# Altium PCB Wristband-v3.PcbDoc (part 2 of 3)
Units mil, origin at the board's own origin, x right, y up, seen from the top; angles counter-clockwise.
Board outline 1990 x 930 mil, 2 copper layers (Top Layer, Bottom Layer); 20 components, 39 nets, 136 pads, 57 vias.
Unrouted connection lines stored in the file: 2.
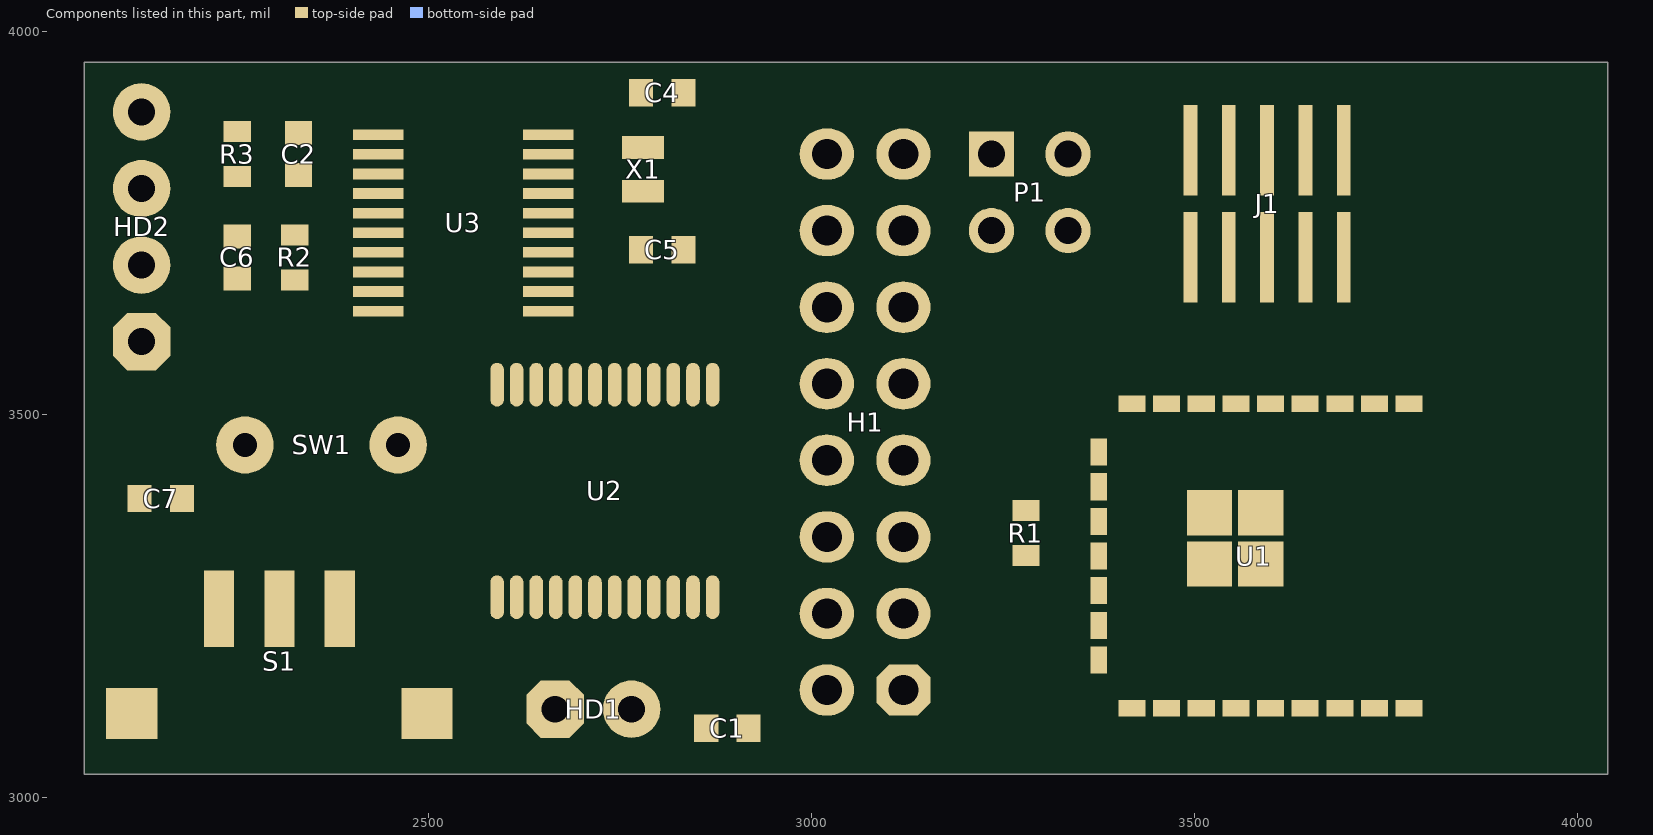
[diagram p2: the components of this part, seen from the top]

## Via types
v1: diameter 10, hole 8, Top Layer to Bottom Layer, 35 vias
v2: diameter 40, hole 25, Top Layer to Bottom Layer, 22 vias

## Nets (pads, with @x,y where several pads share a name; then routed paths per layer and width w, separated by ;. In a path a pad name is that pad's centre, name@x,y a point inside that pad or via, vN(x,y) a via of type N, cw(c..) or ccw(c..) an arc to the next point about the centre after c; other vN are vias at no path point) (continued)
copper on no net: (continued)
  Top Layer w0.5: 3808.75,3790 3836.75,3790 ; 3808.75,3790.5 3819.25,3790.5 ; 3808.75,3791 3819.25,3791 ; 3808.75,3791.5 3819.25,3791.5 ; 3808.75,3792 3819.25,3792 ; 3808.75,3792.5 3819.75,3792.5 ; 3808.75,3793 3819.75,3793 ; 3808.75,3793.5 3819.25,3793.5 ; 3808.75,3794 3818.75,3794 ; 3808.75,3794.5 3818.25,3794.5 ; 3808.75,3795 3817.25,3795 ; 3808.75,3795.5 3820.75,3795.5 ; 3808.75,3796 3820.75,3796 ; 3808.75,3796.5 3821.25,3796.5 ; 3808.75,3797 3821.25,3797 ; 3808.75,3797.5 3821.25,3797.5 ; 3808.75,3798 3821.25,3798 ; 3808.75,3798.5 3821.25,3798.5 ; 3808.75,3799 3836.25,3799 ; 3808.75,3799.5 3836.25,3799.5 ; 3808.75,3800 3836.25,3800 ; 3808.75,3800.5 3836.25,3800.5 ; 3808.75,3801 3836.25,3801 ; 3808.75,3801.5 3836.25,3801.5 ; 3808.75,3802 3836.25,3802 ; 3808.75,3802.5 3836.75,3802.5 ; 3808.75,3803 3836.75,3803 ; 3808.75,3803.5 3823.25,3803.5 ; 3808.75,3804 3818.25,3804 ; 3808.75,3804.5 3816.75,3804.5 ; 3808.75,3805 3816.75,3805 ; 3809.25,3786 3837.25,3786 ; 3809.25,3786.5 3837.25,3786.5 ; 3809.25,3787 3837.25,3787 ; 3809.25,3787.5 3837.25,3787.5 ; 3809.25,3788 3837.25,3788 ; 3809.25,3788.5 3837.25,3788.5 ; 3809.25,3789 3836.75,3789 ; 3809.25,3789.5 3836.75,3789.5 ; 3809.25,3805.5 3816.75,3805.5 ; 3809.25,3806 3816.75,3806 ; 3809.25,3806.5 3816.75,3806.5 ; 3809.25,3807 3817.25,3807 ; 3809.25,3807.5 3819.25,3807.5 ; 3809.25,3808 3821.75,3808 ; 3809.25,3808.5 3822.75,3808.5 ; 3809.25,3809 3821.25,3809 ; 3809.25,3809.5 3819.75,3809.5 ; 3809.25,3810 3818.75,3810 ; 3809.75,3781 3818.25,3781 ; 3809.75,3781.5 3819.25,3781.5 ; 3809.75,3782 3819.75,3782 ; 3809.75,3782.5 3821.75,3782.5 ; 3809.75,3783 3823.75,3783 ; 3809.75,3783.5 3826.25,3783.5 ; 3809.75,3784 3837.75,3784 ; 3809.75,3784.5 3837.75,3784.5 ; 3809.75,3785 3837.25,3785 ; 3809.75,3785.5 3837.25,3785.5 ; 3809.75,3810.5 3817.25,3810.5 ; 3809.75,3811 3817.25,3811 ; 3809.75,3811.5 3817.25,3811.5 ; 3809.75,3812 3817.25,3812 ; 3809.75,3812.5 3817.25,3812.5 ; 3809.75,3813 3817.25,3813 ; 3809.75,3813.5 3817.25,3813.5 ; 3809.75,3814 3838.25,3814 ; 3809.75,3814.5 3838.25,3814.5 ; 3810.25,3778.5 3818.25,3778.5 ; 3810.25,3779 3818.25,3779 ; 3810.25,3779.5 3818.25,3779.5 ; 3810.25,3780 3818.25,3780 ; 3810.25,3780.5 3818.25,3780.5 ; 3810.25,3815 3838.25,3815 ; 3810.25,3815.5 3838.25,3815.5 ; 3810.25,3816 3822.25,3816 ; 3810.25,3816.5 3820.75,3816.5 ; 3810.75,3776 3819.25,3776 ; 3810.75,3776.5 3818.75,3776.5 ; 3810.75,3777 3818.25,3777 ; 3810.75,3777.5 3818.25,3777.5 ; 3810.75,3778 3818.25,3778 ; 3810.75,3817 3820.25,3817 ; 3810.75,3817.5 3819.75,3817.5 ; 3810.75,3818 3819.25,3818 ; 3810.75,3818.5 3818.75,3818.5 ; 3810.75,3819 3818.75,3819 ; 3810.75,3819.5 3818.75,3819.5 ; 3811.25,3774.5 3840.25,3774.5 ; 3811.25,3775 3820.25,3775 ; 3811.25,3775.5 3819.75,3775.5 ; 3811.25,3820 3818.75,3820 ; 3811.25,3820.5 3818.75,3820.5 ; 3811.25,3821 3818.75,3821 ; 3811.75,3772 3822.75,3772 ; 3811.75,3772.5 3824.75,3772.5 ; 3811.75,3773 3825.75,3773 ; 3811.75,3773.5 3827.25,3773.5 ; 3811.75,3774 3840.25,3774 ; 3811.75,3821.5 3818.75,3821.5 ; 3811.75,3822 3819.25,3822 ; 3811.75,3822.5 3819.25,3822.5 ; 3811.75,3823 3819.75,3823 ; 3811.75,3823.5 3820.25,3823.5 ; 3812.25,3770.5 3820.25,3770.5 ; 3812.25,3771 3820.25,3771 ; 3812.25,3771.5 3821.75,3771.5 ; 3812.25,3824 3820.75,3824 ; 3812.25,3824.5 3821.75,3824.5 ; 3812.25,3825 3841.75,3825 ; 3812.75,3768.5 3824.75,3768.5 ; 3812.75,3769 3824.75,3769 ; 3812.75,3769.5 3825.25,3769.5 ; 3812.75,3770 3820.25,3770 ; 3812.75,3825.5 3828.75,3825.5 ; 3812.75,3826 3827.75,3826 ; 3812.75,3826.5 3826.25,3826.5 ; 3812.75,3827 3825.25,3827 ; 3813.25,3767 3823.25,3767 ; 3813.25,3767.5 3823.75,3767.5 ; 3813.25,3768 3824.25,3768 ; 3813.25,3827.5 3823.75,3827.5 ; 3813.25,3828 3822.75,3828 ; 3813.25,3828.5 3821.25,3828.5 ; 3813.75,3765 3822.25,3765 ; 3813.75,3765.5 3822.25,3765.5 ; 3813.75,3766 3822.25,3766 ; 3813.75,3766.5 3822.75,3766.5 ; 3813.75,3829 3821.25,3829 ; 3813.75,3829.5 3821.25,3829.5 ; 3813.75,3830 3821.75,3830 ; 3813.75,3830.5 3821.75,3830.5 ; 3814.25,3764 3822.25,3764 ; 3814.25,3764.5 3822.25,3764.5 ; 3814.25,3831 3822.25,3831 ; 3814.25,3831.5 3822.25,3831.5 ; 3814.75,3762.5 3828.25,3762.5 ; 3814.75,3763 3829.25,3763 ; 3814.75,3763.5 3830.75,3763.5 ; 3814.75,3832 3822.25,3832 ; 3814.75,3832.5 3822.75,3832.5 ; 3814.75,3833 3822.75,3833 ; 3815.25,3761.5 3826.25,3761.5 ; 3815.25,3762 3827.25,3762 ; 3815.25,3833.5 3823.25,3833.5 ; 3815.25,3834 3823.25,3834 ; 3815.75,3759.5 3824.25,3759.5 ; 3815.75,3760 3824.25,3760 ; 3815.75,3760.5 3824.25,3760.5 ; 3815.75,3761 3824.75,3761 ; 3815.75,3834.5 3823.75,3834.5 ; 3815.75,3835 3832.25,3835 ; 3815.75,3835.5 3831.25,3835.5 ; 3816.25,3759 3831.25,3759 ; 3816.25,3836 3830.25,3836 ; 3816.25,3836.5 3829.25,3836.5 ; 3816.75,3757.5 3830.25,3757.5 ; 3816.75,3758 3830.25,3758 ; 3816.75,3758.5 3831.25,3758.5 ; 3816.75,3837 3828.25,3837 ; 3816.75,3837.5 3827.25,3837.5 ; 3816.75,3838 3826.25,3838 ; 3817.25,3756.5 3829.25,3756.5 ; 3817.25,3757 3829.25,3757 ; 3817.25,3838.5 3825.25,3838.5 ; 3817.25,3839 3825.75,3839 ; 3817.75,3755.5 3828.25,3755.5 ; 3817.75,3756 3828.25,3756 ; 3817.75,3839.5 3825.75,3839.5 ; 3817.75,3840 3832.75,3840 ; 3817.75,3840.5 3831.75,3840.5 ; 3818.25,3754.5 3827.25,3754.5 ; 3818.25,3755 3827.75,3755 ; 3818.25,3806 3836.75,3806 ; 3818.25,3813.5 3838.25,3813.5 ; 3818.25,3841 3831.25,3841 ; 3818.75,3753 3827.75,3753 ; 3818.75,3753.5 3827.25,3753.5 ; 3818.75,3754 3827.25,3754 ; 3818.75,3811.5 3820.25,3811.5 ; 3818.75,3841.5 3830.25,3841.5 ; 3818.75,3842 3829.75,3842 ; 3818.75,3842.5 3828.75,3842.5 ; 3819.25,3752.5 3836.75,3752.5 ; 3819.25,3843 3828.25,3843 ; 3819.75,3751 3834.75,3751 ; 3819.75,3751.5 3835.25,3751.5 ; 3819.75,3752 3836.25,3752 ; 3819.75,3777.5 3825.75,3777.5 ; 3819.75,3778 3827.25,3778 ; 3819.75,3778.5 3839.25,3778.5 ; 3819.75,3779 3838.75,3779 ; 3819.75,3779.5 3838.75,3779.5 ; 3819.75,3780 3838.75,3780 ; 3819.75,3790.5 3836.75,3790.5 ; 3819.75,3811 3837.75,3811 ; 3819.75,3843.5 3827.75,3843.5 ; 3819.75,3844 3828.25,3844 ; 3819.75,3844.5 3828.25,3844.5 ; 3820.25,3750.5 3834.25,3750.5 ; 3820.25,3791 3822.75,3791 ; 3820.25,3819.5 3826.75,3819.5 ; 3820.25,3820 3826.75,3820 ; 3820.25,3820.5 3826.75,3820.5 ; 3820.25,3821 3826.75,3821 ; 3820.25,3821.5 3826.25,3821.5 ; 3820.25,3845 3839.75,3845 ; 3820.75,3749.5 3832.75,3749.5 ; 3820.75,3750 3833.25,3750 ; 3820.75,3777 3822.75,3777 ; 3820.75,3780.5 3838.25,3780.5 ; 3820.75,3791.5 3822.25,3791.5 ; 3820.75,3819 3826.75,3819 ; 3820.75,3822 3825.75,3822 ; 3820.75,3845.5 3838.75,3845.5 ; 3820.75,3846 3838.25,3846 ; 3821.25,3748.5 3831.25,3748.5 ; 3821.25,3749 3831.75,3749 ; 3821.25,3805.5 3836.75,3805.5 ; 3821.25,3806.5 3836.75,3806.5 ; 3821.25,3810.5 3837.25,3810.5 ; 3821.25,3818.5 3826.25,3818.5 ; 3821.25,3846.5 3837.75,3846.5 ; 3821.25,3847 3837.25,3847 ; 3821.75,3747.5 3831.25,3747.5 ; 3821.75,3748 3830.75,3748 ; 3821.75,3797 3836.25,3797 ; 3821.75,3797.5 3836.25,3797.5 ; 3821.75,3798 3836.25,3798 ; 3821.75,3798.5 3836.25,3798.5 ; 3821.75,3818 3826.25,3818 ; 3821.75,3822.5 3823.75,3822.5 ; 3821.75,3847.5 3836.25,3847.5 ; 3821.75,3848 3835.75,3848 ; 3822.25,3746.5 3831.75,3746.5 ; 3822.25,3747 3831.25,3747 ; 3822.25,3770 3825.75,3770 ; 3822.25,3775 3840.25,3775 ; 3822.25,3795.5 3836.25,3795.5 ; 3822.25,3796 3836.25,3796 ; 3822.25,3796.5 3836.25,3796.5 ; 3822.25,3810 3837.25,3810 ; 3822.25,3848.5 3835.25,3848.5 ; 3822.25,3849 3834.25,3849 ; 3822.75,3745.5 3832.75,3745.5 ; 3822.75,3746 3832.25,3746 ; 3822.75,3781 3838.25,3781 ; 3822.75,3830 3825.75,3830 ; 3822.75,3849.5 3833.75,3849.5 ; 3822.75,3850 3833.25,3850 ; 3823.25,3745 3832.75,3745 ; 3823.25,3764 3831.25,3764 ; 3823.25,3792.5 3836.75,3792.5 ; 3823.25,3793 3836.75,3793 ; 3823.25,3807 3837.25,3807 ; 3823.25,3830.5 3825.75,3830.5 ; 3823.25,3831 3826.25,3831 ; 3823.25,3850.5 3832.25,3850.5 ; 3823.75,3744 3833.75,3744 ; 3823.75,3744.5 3833.25,3744.5 ; 3823.75,3770.5 3826.25,3770.5 ; 3823.75,3775.5 3839.75,3775.5 ; 3823.75,3791 3836.75,3791 ; 3823.75,3791.5 3836.75,3791.5 ; 3823.75,3792 3836.75,3792 ; 3823.75,3793.5 3836.75,3793.5 ; 3823.75,3809.5 3837.25,3809.5 ; 3823.75,3813 3838.25,3813 ; 3823.75,3829.5 3825.25,3829.5 ; 3823.75,3831.5 3826.25,3831.5 ; 3823.75,3832 3826.25,3832 ; 3823.75,3851 3833.25,3851 ; 3823.75,3851.5 3833.25,3851.5 ; 3824.25,3743.5 3834.25,3743.5 ; 3824.25,3764.5 3844.75,3764.5 ; 3824.25,3794 3836.25,3794 ; 3824.25,3824.5 3841.75,3824.5 ; 3824.25,3832.5 3825.75,3832.5 ; 3824.25,3852 3833.75,3852 ; 3824.75,3742.5 3838.25,3742.5 ; 3824.75,3743 3838.75,3743 ; 3824.75,3781.5 3838.25,3781.5 ; 3824.75,3794.5 3836.25,3794.5 ; 3824.75,3829 3825.25,3829 ; 3824.75,3852.5 3834.25,3852.5 ; 3824.75,3853 3834.25,3853 ; 3825.25,3742 3837.75,3742 ; 3825.25,3767 3826.25,3767 ; 3825.25,3771 3826.75,3771 ; 3825.25,3809 3837.25,3809 ; 3825.25,3853.5 3834.75,3853.5 ; 3825.75,3741 3836.25,3741 ; 3825.75,3741.5 3837.25,3741.5 ; 3825.75,3759.5 3832.25,3759.5 ; 3825.75,3765 3844.25,3765 ; 3825.75,3767.5 3828.25,3767.5 ; 3825.75,3768 3829.25,3768 ; 3825.75,3795 3836.25,3795 ; 3825.75,3816 3838.75,3816 ; 3825.75,3824 3841.25,3824 ; 3825.75,3854 3835.25,3854 ; 3825.75,3854.5 3835.75,3854.5 ; 3826.25,3740.5 3836.25,3740.5 ; 3826.25,3768.5 3842.75,3768.5 ; 3826.25,3803.5 3836.75,3803.5 ; 3826.25,3804 3836.75,3804 ; 3826.25,3804.5 3836.75,3804.5 ; 3826.25,3805 3836.75,3805 ; 3826.25,3807.5 3837.25,3807.5 ; 3826.25,3834.5 3832.75,3834.5 ; 3826.25,3855 3836.25,3855 ; 3826.75,3739.5 3840.75,3739.5 ; 3826.75,3740 3836.75,3740 ; 3826.75,3760 3832.25,3760 ; 3826.75,3769 3842.25,3769 ; 3826.75,3776 3839.75,3776 ; 3826.75,3782.5 3838.25,3782.5 ; 3826.75,3783 3837.75,3783 ; 3826.75,3783.5 3837.75,3783.5 ; 3826.75,3808 3837.25,3808 ; 3826.75,3808.5 3837.25,3808.5 ; 3826.75,3811.5 3837.75,3811.5 ; 3826.75,3812 3837.75,3812 ; 3826.75,3812.5 3837.75,3812.5 ; 3826.75,3816.5 3838.75,3816.5 ; 3826.75,3823.5 3841.25,3823.5 ; 3826.75,3828.5 3829.75,3828.5 ; 3826.75,3829 3830.25,3829 ; 3826.75,3829.5 3830.25,3829.5 ; 3826.75,3830 3830.25,3830 ; 3826.75,3833.5 3845.75,3833.5 ; 3826.75,3834 3846.25,3834 ; 3826.75,3855.5 3836.25,3855.5 ; 3826.75,3856 3846.25,3856 ; 3827.25,3739 3840.75,3739 ; 3827.25,3765.5 3843.75,3765.5 ; 3827.25,3769.5 3842.25,3769.5 ; 3827.25,3782 3838.25,3782 ; 3827.25,3817 3838.75,3817 ; 3827.25,3823 3840.75,3823 ; 3827.25,3828 3829.75,3828 ; 3827.25,3830.5 3830.25,3830.5 ; 3827.25,3832.5 3827.75,3832.5 ; 3827.25,3833 3828.25,3833 ; 3827.25,3839.5 3833.25,3839.5 ; 3827.25,3856.5 3845.75,3856.5 ; 3827.75,3738 3840.25,3738 ; 3827.75,3738.5 3840.25,3738.5 ; 3827.75,3760.5 3833.25,3760.5 ; 3827.75,3770 3841.75,3770 ; 3827.75,3770.5 3841.75,3770.5 ; 3827.75,3777.5 3839.25,3777.5 ; 3827.75,3778 3839.25,3778 ; 3827.75,3817.5 3839.25,3817.5 ; 3827.75,3818 3839.25,3818 ; 3827.75,3822 3840.25,3822 ; 3827.75,3822.5 3840.75,3822.5 ; 3827.75,3831 3830.25,3831 ; 3827.75,3839 3834.25,3839 ; 3827.75,3857 3845.75,3857 ; 3827.75,3857.5 3845.75,3857.5 ; 3828.25,3737.5 3840.25,3737.5 ; 3828.25,3771 3841.75,3771 ; 3828.25,3776.5 3839.25,3776.5 ; 3828.25,3777 3839.25,3777 ; 3828.25,3818.5 3839.25,3818.5 ; 3828.25,3819 3839.25,3819 ; 3828.25,3821 3840.25,3821 ; 3828.25,3821.5 3840.25,3821.5 ; 3828.25,3831.5 3829.25,3831.5 ; 3828.25,3858 3845.75,3858 ; 3828.75,3736.5 3839.75,3736.5 ; 3828.75,3737 3839.75,3737 ; 3828.75,3753 3837.25,3753 ; 3828.75,3766 3843.75,3766 ; 3828.75,3771.5 3841.25,3771.5 ; 3828.75,3819.5 3839.75,3819.5 ; 3828.75,3820 3839.75,3820 ; 3828.75,3820.5 3840.25,3820.5 ; 3828.75,3827.5 3829.25,3827.5 ; 3828.75,3844.5 3853.25,3844.5 ; 3828.75,3858.5 3845.75,3858.5 ; 3828.75,3859 3845.75,3859 ; 3829.25,3761 3833.25,3761 ; 3829.25,3772 3841.25,3772 ; 3829.25,3772.5 3840.75,3772.5 ; 3829.25,3773 3840.75,3773 ; 3829.25,3773.5 3840.75,3773.5 ; 3829.25,3838.5 3835.25,3838.5 ; 3829.25,3859.5 3845.75,3859.5 ; 3829.75,3735.5 3846.75,3735.5 ; 3829.75,3736 3840.25,3736 ; 3829.75,3761.5 3846.25,3761.5 ; 3829.75,3766.5 3843.75,3766.5 ; 3829.75,3825.5 3841.75,3825.5 ; 3829.75,3838 3848.25,3838 ; 3829.75,3844 3852.75,3844 ; 3829.75,3860 3844.75,3860 ; 3830.25,3735 3843.75,3735 ; 3830.25,3753.5 3849.75,3753.5 ; 3830.25,3755.5 3832.75,3755.5 ; 3830.25,3826 3842.25,3826 ; 3830.25,3826.5 3842.25,3826.5 ; 3830.25,3860.5 3843.75,3860.5 ; 3830.75,3734.5 3843.75,3734.5 ; 3830.75,3756 3834.75,3756 ; 3830.75,3768 3842.75,3768 ; 3830.75,3827 3842.75,3827 ; 3830.75,3827.5 3842.75,3827.5 ; 3830.75,3828 3842.75,3828 ; 3830.75,3833 3845.25,3833 ; 3830.75,3843.5 3837.25,3843.5 ; 3830.75,3861 3843.75,3861 ; 3830.75,3861.5 3843.75,3861.5 ; 3831.25,3734 3843.25,3734 ; 3831.25,3756.5 3849.25,3756.5 ; 3831.25,3762 3845.75,3762 ; 3831.25,3767 3843.25,3767 ; 3831.25,3767.5 3842.75,3767.5 ; 3831.25,3828.5 3843.25,3828.5 ; 3831.25,3829 3843.25,3829 ; 3831.25,3832.5 3845.25,3832.5 ; 3831.25,3837.5 3847.75,3837.5 ; 3831.25,3843 3837.25,3843 ; 3831.25,3862 3843.25,3862 ; 3831.75,3733 3843.75,3733 ; 3831.75,3733.5 3843.75,3733.5 ; 3831.75,3757 3848.75,3757 ; 3831.75,3829.5 3843.75,3829.5 ; 3831.75,3830 3843.75,3830 ; 3831.75,3830.5 3844.25,3830.5 ; 3831.75,3831 3844.25,3831 ; 3831.75,3831.5 3844.75,3831.5 ; 3831.75,3832 3844.75,3832 ; 3831.75,3837 3847.75,3837 ; 3831.75,3862.5 3843.75,3862.5 ; 3832.25,3732.5 3843.75,3732.5 ; 3832.25,3757.5 3848.75,3757.5 ; 3832.25,3762.5 3845.75,3762.5 ; 3832.25,3842.5 3836.75,3842.5 ; 3832.25,3863 3843.75,3863 ; 3832.75,3731.5 3844.75,3731.5 ; 3832.75,3732 3844.25,3732 ; 3832.75,3747.5 3836.25,3747.5 ; 3832.75,3758 3848.25,3758 ; 3832.75,3758.5 3847.75,3758.5 ; 3832.75,3763.5 3844.75,3763.5 ; 3832.75,3764 3844.75,3764 ; 3832.75,3836.5 3847.25,3836.5 ; 3832.75,3842 3836.25,3842 ; 3832.75,3863.5 3843.75,3863.5 ; 3832.75,3864 3844.75,3864 ; 3833.25,3747 3850.75,3747 ; 3833.25,3748 3836.25,3748 ; 3833.25,3754 3849.75,3754 ; 3833.25,3763 3845.25,3763 ; 3833.75,3731 3844.75,3731 ; 3833.75,3746 3842.25,3746 ; 3833.75,3746.5 3842.75,3746.5 ; 3833.75,3748.5 3835.75,3748.5 ; 3833.75,3759 3847.25,3759 ; 3833.75,3759.5 3847.25,3759.5 ; 3833.75,3761 3846.25,3761 ; 3833.75,3834.5 3846.25,3834.5 ; 3833.75,3836 3847.25,3836 ; 3833.75,3841.5 3836.25,3841.5 ; 3833.75,3864.5 3844.75,3864.5 ; 3833.75,3865 3858.75,3865 ; 3834.25,3730.5 3845.75,3730.5 ; 3834.25,3745.5 3841.75,3745.5 ; 3834.25,3760.5 3846.75,3760.5 ; 3834.25,3835 3846.75,3835 ; 3834.25,3835.5 3846.75,3835.5 ; 3834.25,3841 3835.75,3841 ; 3834.75,3729.5 3851.25,3729.5 ; 3834.75,3730 3851.75,3730 ; 3834.75,3743.5 3839.25,3743.5 ; 3834.75,3744.5 3840.25,3744.5 ; 3834.75,3745 3841.25,3745 ; 3834.75,3749 3835.25,3749 ; 3834.75,3760 3846.75,3760 ; 3834.75,3851 3837.75,3851 ; 3834.75,3865.5 3858.75,3865.5 ; 3834.75,3866 3858.25,3866 ; 3835.25,3729 3850.75,3729 ; 3835.25,3744 3839.75,3744 ; 3835.25,3754.5 3849.75,3754.5 ; 3835.25,3850.5 3837.25,3850.5 ; 3835.25,3851.5 3838.25,3851.5 ; 3835.25,3866.5 3857.75,3866.5 ; 3835.75,3728.5 3850.25,3728.5 ; 3835.75,3838.5 3848.75,3838.5 ; 3835.75,3850 3837.25,3850 ; 3835.75,3852 3860.25,3852 ; 3835.75,3852.5 3860.75,3852.5 ; 3835.75,3867 3857.75,3867 ; 3836.25,3728 3849.75,3728 ; 3836.25,3750 3839.25,3750 ; 3836.25,3839 3849.25,3839 ; 3836.25,3853 3861.25,3853 ; 3836.25,3867.5 3857.25,3867.5 ; 3836.75,3727.5 3849.75,3727.5 ; 3836.75,3749 3839.75,3749 ; 3836.75,3749.5 3839.25,3749.5 ; 3836.75,3750.5 3838.75,3750.5 ; 3836.75,3755.5 3849.75,3755.5 ; 3836.75,3756 3849.25,3756 ; 3836.75,3839.5 3849.25,3839.5 ; 3836.75,3840 3849.75,3840 ; 3836.75,3853.5 3861.75,3853.5 ; 3836.75,3854 3862.25,3854 ; 3836.75,3855.5 3846.75,3855.5 ; 3836.75,3868 3856.75,3868 ; 3837.25,3727 3849.75,3727 ; 3837.25,3747.5 3850.25,3747.5 ; 3837.25,3748.5 3840.25,3748.5 ; 3837.25,3755 3849.75,3755 ; 3837.25,3840.5 3850.25,3840.5 ; 3837.25,3841 3850.75,3841 ; 3837.25,3855 3863.75,3855 ; 3837.25,3868.5 3856.75,3868.5 ; 3837.75,3726.5 3857.25,3726.5 ; 3837.75,3740 3841.25,3740 ; 3837.75,3748 3840.25,3748 ; 3837.75,3751 3838.25,3751 ; 3837.75,3841.5 3850.75,3841.5 ; 3837.75,3842 3851.25,3842 ; 3837.75,3848.5 3841.25,3848.5 ; 3837.75,3849 3841.75,3849 ; 3837.75,3854.5 3862.75,3854.5 ; 3837.75,3869 3856.25,3869 ; 3838.25,3726 3856.75,3726 ; 3838.25,3740.5 3841.25,3740.5 ; 3838.25,3842.5 3851.75,3842.5 ; 3838.25,3849.5 3841.75,3849.5 ; 3838.25,3850 3842.25,3850 ; 3838.25,3869.5 3855.75,3869.5 ; 3838.75,3725.5 3856.75,3725.5 ; 3838.75,3752.5 3849.75,3752.5 ; 3838.75,3753 3849.75,3753 ; 3838.75,3790.5 3863.75,3790.5 ; 3838.75,3791 3863.75,3791 ; 3838.75,3791.5 3863.75,3791.5 ; 3838.75,3792 3863.75,3792 ; 3838.75,3792.5 3863.75,3792.5 ; 3838.75,3793 3863.75,3793 ; 3838.75,3793.5 3863.75,3793.5 ; 3838.75,3794 3863.75,3794 ; 3838.75,3794.5 3863.75,3794.5 ; 3838.75,3795 3863.75,3795 ; 3838.75,3795.5 3863.75,3795.5 ; 3838.75,3796 3863.75,3796 ; 3838.75,3796.5 3863.75,3796.5 ; 3838.75,3797 3863.75,3797 ; 3838.75,3797.5 3863.75,3797.5 ; 3838.75,3798 3863.75,3798 ; 3838.75,3798.5 3863.75,3798.5 ; 3838.75,3799 3863.75,3799 ; 3838.75,3799.5 3863.75,3799.5 ; 3838.75,3800 3863.75,3800 ; 3838.75,3800.5 3863.75,3800.5 ; 3838.75,3801 3863.75,3801 ; 3838.75,3801.5 3863.75,3801.5 ; 3838.75,3802 3863.75,3802 ; 3838.75,3802.5 3863.75,3802.5 ; 3838.75,3803 3863.75,3803 ; 3838.75,3803.5 3863.75,3803.5 ; 3838.75,3804 3863.75,3804 ; 3838.75,3804.5 3863.75,3804.5 ; 3838.75,3805 3863.75,3805 ; 3838.75,3843 3851.75,3843 ; 3838.75,3843.5 3852.25,3843.5 ; 3838.75,3848 3840.75,3848 ; 3838.75,3850.5 3842.75,3850.5 ; 3838.75,3851.5 3859.75,3851.5 ; 3838.75,3870 3855.75,3870 ; 3839.25,3725 3855.75,3725 ; 3839.25,3741 3841.25,3741 ; 3839.25,3752 3849.75,3752 ; 3839.25,3787.5 3863.75,3787.5 ; 3839.25,3788 3863.75,3788 ; 3839.25,3788.5 3863.75,3788.5 ; 3839.25,3789 3863.75,3789 ; 3839.25,3789.5 3863.75,3789.5 ; 3839.25,3790 3863.75,3790 ; 3839.25,3805.5 3863.75,3805.5 ; 3839.25,3806 3863.75,3806 ; 3839.25,3806.5 3863.75,3806.5 ; 3839.25,3807 3863.75,3807 ; 3839.25,3807.5 3863.75,3807.5 ; 3839.25,3808 3863.75,3808 ; 3839.25,3847.5 3840.25,3847.5 ; 3839.25,3851 3859.25,3851 ; 3839.25,3870.5 3855.25,3870.5 ; 3839.75,3724.5 3855.75,3724.5 ; 3839.75,3741.5 3840.75,3741.5 ; 3839.75,3751.5 3849.75,3751.5 ; 3839.75,3784 3863.75,3784 ; 3839.75,3784.5 3863.75,3784.5 ; 3839.75,3785 3863.75,3785 ; 3839.75,3785.5 3863.75,3785.5 ; 3839.75,3786 3863.75,3786 ; 3839.75,3786.5 3863.75,3786.5 ; 3839.75,3787 3863.75,3787 ; 3839.75,3808.5 3863.75,3808.5 ; 3839.75,3809 3863.75,3809 ; 3839.75,3809.5 3863.75,3809.5 ; 3839.75,3810 3863.75,3810 ; 3839.75,3810.5 3863.75,3810.5 ; 3839.75,3811 3863.75,3811 ; 3839.75,3811.5 3863.75,3811.5 ; 3839.75,3871 3854.75,3871 ; 3840.25,3724 3855.25,3724 ; 3840.25,3750.5 3849.75,3750.5 ; 3840.25,3751 3849.75,3751 ; 3840.25,3782 3925.75,3782 ; 3840.25,3782.5 3925.75,3782.5 ; 3840.25,3783 3925.25,3783 ; 3840.25,3783.5 3925.25,3783.5 ; 3840.25,3812 3869.25,3812 ; 3840.25,3812.5 3868.75,3812.5 ; 3840.25,3813 3868.75,3813 ; 3840.25,3813.5 3869.25,3813.5 ; 3840.25,3845 3853.75,3845 ; 3840.25,3871.5 3854.75,3871.5 ; 3840.75,3723.5 3854.75,3723.5 ; 3840.75,3750 3849.75,3750 ; 3840.75,3780.5 3926.25,3780.5 ; 3840.75,3781 3926.25,3781 ; 3840.75,3781.5 3925.75,3781.5 ; 3840.75,3814 3869.25,3814 ; 3840.75,3814.5 3869.25,3814.5 ; 3840.75,3815 3869.25,3815 ; 3840.75,3845.5 3853.75,3845.5 ; 3840.75,3872 3854.75,3872 ; 3841.25,3723 3854.75,3723 ; 3841.25,3736 3846.75,3736 ; 3841.25,3736.5 3846.75,3736.5 ; 3841.25,3737 3846.75,3737 ; 3841.25,3742.5 3844.75,3742.5 ; 3841.25,3743 3844.75,3743 ; 3841.25,3748 3850.25,3748 ; 3841.25,3749.5 3850.25,3749.5 ; 3841.25,3778.5 3925.75,3778.5 ; 3841.25,3779 3926.25,3779 ; 3841.25,3779.5 3926.75,3779.5 ; 3841.25,3780 3926.75,3780 ; 3841.25,3815.5 3869.75,3815.5 ; 3841.25,3816 3869.75,3816 ; 3841.25,3816.5 3870.25,3816.5 ; 3841.25,3817 3870.75,3817 ; 3841.25,3846 3854.25,3846 ; 3841.25,3846.5 3854.75,3846.5 ; 3841.25,3872.5 3855.25,3872.5 ; 3841.75,3722.5 3855.25,3722.5 ; 3841.75,3737.5 3846.75,3737.5 ; 3841.75,3743.5 3844.25,3743.5 ; 3841.75,3748.5 3850.25,3748.5 ; 3841.75,3749 3850.25,3749 ; 3841.75,3777 3924.25,3777 ; 3841.75,3777.5 3925.25,3777.5 ; 3841.75,3778 3925.25,3778 ; 3841.75,3817.5 3871.25,3817.5 ; 3841.75,3818 3871.75,3818 ; 3841.75,3818.5 3873.25,3818.5 ; 3841.75,3847 3855.25,3847 ; 3841.75,3873 3861.25,3873 ; 3842.25,3722 3855.75,3722 ; 3842.25,3738 3846.75,3738 ; 3842.25,3738.5 3847.25,3738.5 ; 3842.25,3739 3847.75,3739 ; 3842.25,3741.5 3844.75,3741.5 ; 3842.25,3742 3844.75,3742 ; 3842.25,3775 3922.25,3775 ; 3842.25,3775.5 3923.25,3775.5 ; 3842.25,3776 3923.25,3776 ; 3842.25,3776.5 3924.25,3776.5 ; 3842.25,3819 3876.75,3819 ; 3842.25,3819.5 3876.75,3819.5 ; 3842.25,3820 3877.75,3820 ; 3842.25,3820.5 3877.75,3820.5 ; 3842.25,3847.5 3855.75,3847.5 ; 3842.25,3873.5 3860.75,3873.5 ; 3842.75,3721.5 3864.25,3721.5 ; 3842.75,3744 3843.75,3744 ; 3842.75,3774 3921.75,3774 ; 3842.75,3774.5 3922.25,3774.5 ; 3842.75,3821 3878.25,3821 ; 3842.75,3821.5 3878.75,3821.5 ; 3842.75,3822 3879.25,3822 ; 3842.75,3848 3856.25,3848 ; 3842.75,3874 3860.75,3874 ; 3843.25,3741 3844.25,3741 ; 3843.25,3744.5 3843.75,3744.5 ; 3843.25,3772.5 3920.25,3772.5 ; 3843.25,3773 3920.75,3773 ; 3843.25,3773.5 3921.25,3773.5 ; 3843.25,3822.5 3879.75,3822.5 ; 3843.25,3823 3879.75,3823 ; 3843.25,3848.5 3856.75,3848.5 ; 3843.25,3849 3857.25,3849 ; 3843.25,3850.5 3858.75,3850.5 ; 3843.75,3721 3863.75,3721 ; 3843.75,3746.5 3850.75,3746.5 ; 3843.75,3771.5 3919.25,3771.5 ; 3843.75,3772 3919.75,3772 ; 3843.75,3823.5 3880.75,3823.5 ; 3843.75,3824 3880.75,3824 ; 3843.75,3824.5 3881.25,3824.5 ; 3843.75,3849.5 3857.75,3849.5 ; 3843.75,3850 3858.25,3850 ; 3843.75,3874.5 3860.25,3874.5 ; 3844.25,3720.5 3863.75,3720.5 ; 3844.25,3735 3847.25,3735 ; 3844.25,3745.5 3850.75,3745.5 ; 3844.25,3746 3850.75,3746 ; 3844.25,3769.5 3917.25,3769.5 ; 3844.25,3770 3917.75,3770 ; 3844.25,3770.5 3918.25,3770.5 ; 3844.25,3771 3918.75,3771 ; 3844.25,3825 3881.75,3825 ; 3844.25,3825.5 3882.25,3825.5 ; 3844.25,3826 3882.75,3826 ; 3844.25,3875 3859.75,3875 ; 3844.75,3720 3863.25,3720 ; 3844.75,3745 3851.25,3745 ; 3844.75,3769 3916.25,3769 ; 3844.75,3826.5 3883.25,3826.5 ; 3844.75,3861.5 3846.75,3861.5 ; 3844.75,3862 3846.75,3862 ; 3844.75,3862.5 3846.75,3862.5 ; 3844.75,3863 3846.75,3863 ; 3844.75,3875.5 3859.75,3875.5 ; 3845.25,3719.5 3862.75,3719.5 ; 3845.25,3732.5 3848.25,3732.5 ; 3845.25,3733 3848.25,3733 ; 3845.25,3733.5 3848.25,3733.5 ; 3845.25,3734 3847.75,3734 ; 3845.25,3734.5 3847.75,3734.5 ; 3845.25,3739.5 3855.25,3739.5 ; 3845.25,3744.5 3851.25,3744.5 ; 3845.25,3767.5 3914.75,3767.5 ; 3845.25,3768 3915.25,3768 ; 3845.25,3768.5 3916.25,3768.5 ; 3845.25,3827 3883.75,3827 ; 3845.25,3827.5 3883.75,3827.5 ; 3845.25,3828 3884.75,3828 ; 3845.25,3863.5 3846.25,3863.5 ; 3845.25,3876 3860.75,3876 ; 3845.75,3719 3862.75,3719 ; 3845.75,3744 3851.75,3744 ; 3845.75,3767 3914.25,3767 ; 3845.75,3828.5 3884.75,3828.5 ; 3845.75,3829 3885.75,3829 ; 3845.75,3861 3846.75,3861 ; 3845.75,3876.5 3864.75,3876.5 ; 3846.25,3718.5 3862.25,3718.5 ; 3846.25,3732 3847.75,3732 ; 3846.25,3740 3854.75,3740 ; 3846.25,3740.5 3853.75,3740.5 ; 3846.25,3743 3851.75,3743 ; 3846.25,3743.5 3851.75,3743.5 ; 3846.25,3765.5 3912.75,3765.5 ; 3846.25,3766 3913.25,3766 ; 3846.25,3766.5 3913.75,3766.5 ; 3846.25,3829.5 3885.75,3829.5 ; 3846.25,3830 3886.75,3830 ; 3846.25,3877 3864.75,3877 ; 3846.75,3741 3853.75,3741 ; 3846.75,3741.5 3853.25,3741.5 ; 3846.75,3742 3852.75,3742 ; 3846.75,3742.5 3852.75,3742.5 ; 3846.75,3764.5 3911.75,3764.5 ; 3846.75,3765 3911.75,3765 ; 3846.75,3830.5 3886.75,3830.5 ; 3846.75,3831 3887.75,3831 ; 3847.25,3718 3861.75,3718 ; 3847.25,3763.5 3910.25,3763.5 ; 3847.25,3764 3910.75,3764 ; 3847.25,3831.5 3887.75,3831.5 ; 3847.25,3832 3888.75,3832 ; 3847.25,3857.5 3849.75,3857.5 ; 3847.25,3858 3850.25,3858 ; 3847.25,3858.5 3850.25,3858.5 ; 3847.25,3859 3848.75,3859 ; 3847.25,3864 3877.25,3864 ; 3847.25,3864.5 3859.25,3864.5 ; 3847.25,3877.5 3864.25,3877.5 ; 3847.75,3717.5 3862.75,3717.5 ; 3847.75,3763 3909.75,3763 ; 3847.75,3832.5 3888.75,3832.5 ; 3847.75,3861 3850.75,3861 ; 3847.75,3861.5 3850.25,3861.5 ; 3847.75,3863.5 3876.25,3863.5 ; 3847.75,3878 3864.25,3878 ; 3848.25,3730.5 3852.25,3730.5 ; 3848.25,3736.5 3851.25,3736.5 ; 3848.25,3737 3850.75,3737 ; 3848.25,3737.5 3850.75,3737.5 ; 3848.25,3762 3908.75,3762 ; 3848.25,3762.5 3909.25,3762.5 ; 3848.25,3833 3889.75,3833 ; 3848.25,3833.5 3889.75,3833.5 ; 3848.25,3834 3890.75,3834 ; 3848.25,3857 3849.25,3857 ; 3848.25,3862 3850.25,3862 ; 3848.25,3862.5 3849.75,3862.5 ; 3848.25,3863 3850.75,3863 ; 3848.25,3878.5 3865.25,3878.5 ; 3848.75,3717 3873.25,3717 ; 3848.75,3735.5 3851.25,3735.5 ; 3848.75,3736 3851.25,3736 ; 3848.75,3761 3907.25,3761 ; 3848.75,3761.5 3908.25,3761.5 ; 3848.75,3834.5 3890.75,3834.5 ; 3848.75,3860.5 3850.75,3860.5 ; 3849.25,3716.5 3873.25,3716.5 ; 3849.25,3731 3852.25,3731 ; 3849.25,3731.5 3852.75,3731.5 ; 3849.25,3734.5 3871.75,3734.5 ; 3849.25,3735 3871.25,3735 ; 3849.25,3760 3906.25,3760 ; 3849.25,3760.5 3906.75,3760.5 ; 3849.25,3835 3891.75,3835 ; 3849.25,3835.5 3891.75,3835.5 ; 3849.25,3855.5 3863.75,3855.5 ; 3849.25,3879 3866.25,3879 ; 3849.75,3716 3872.75,3716 ; 3849.75,3732 3853.25,3732 ; 3849.75,3732.5 3853.75,3732.5 ; 3849.75,3733 3854.25,3733 ; 3849.75,3733.5 3854.75,3733.5 ; 3849.75,3734 3854.75,3734 ; 3849.75,3759.5 3905.75,3759.5 ; 3849.75,3836 3892.75,3836 ; 3849.75,3879.5 3866.75,3879.5 ; 3850.25,3715.5 3872.75,3715.5 ; 3850.25,3758.5 3904.25,3758.5 ; 3850.25,3759 3904.75,3759 ; 3850.25,3836.5 3892.75,3836.5 ; 3850.25,3837 3893.75,3837 ; 3850.25,3856 3864.75,3856 ; 3850.25,3880 3868.25,3880 ; 3850.75,3739 3855.75,3739 ; 3850.75,3758 3903.75,3758 ; 3850.75,3837.5 3893.75,3837.5 ; 3850.75,3856.5 3865.25,3856.5 ; 3851.25,3715 3872.75,3715 ; 3851.25,3727 3857.75,3727 ; 3851.25,3738.5 3856.75,3738.5 ; 3851.25,3757 3902.25,3757 ; 3851.25,3757.5 3903.25,3757.5 ; 3851.25,3838 3894.75,3838 ; 3851.25,3838.5 3894.75,3838.5 ; 3851.25,3857 3865.75,3857 ; 3851.25,3857.5 3866.75,3857.5 ; 3851.25,3862.5 3874.25,3862.5 ; 3851.25,3863 3875.25,3863 ; 3851.25,3880.5 3868.75,3880.5 ; 3851.75,3714.5 3872.75,3714.5 ; 3851.75,3727.5 3857.75,3727.5 ; 3851.75,3738 3857.75,3738 ; 3851.75,3756.5 3901.75,3756.5 ; 3851.75,3839 3895.75,3839 ; 3851.75,3858 3867.75,3858 ; 3851.75,3858.5 3868.25,3858.5 ; 3851.75,3861.5 3872.75,3861.5 ; 3851.75,3862 3873.75,3862 ; 3851.75,3881 3872.25,3881 ; 3852.25,3728 3858.25,3728 ; 3852.25,3728.5 3858.75,3728.5 ; 3852.25,3736.5 3868.75,3736.5 ; 3852.25,3737 3861.25,3737 ; 3852.25,3737.5 3859.25,3737.5 ; 3852.25,3748.5 3855.25,3748.5 ; 3852.25,3749 3854.75,3749 ; 3852.25,3749.5 3854.25,3749.5 ; 3852.25,3750 3853.75,3750 ; 3852.25,3750.5 3853.75,3750.5 ; 3852.25,3751 3853.25,3751 ; 3852.25,3751.5 3852.75,3751.5 ; 3852.25,3755.5 3900.75,3755.5 ; 3852.25,3756 3901.25,3756 ; 3852.25,3839.5 3896.25,3839.5 ; 3852.25,3840 3896.75,3840 ; 3852.25,3859 3868.75,3859 ; 3852.25,3861 3871.75,3861 ; 3852.25,3881.5 3872.25,3881.5 ; 3852.75,3714 3872.75,3714 ; 3852.75,3729 3859.25,3729 ; 3852.75,3735.5 3870.75,3735.5 ; 3852.75,3736 3869.75,3736 ; 3852.75,3746.5 3857.25,3746.5 ; 3852.75,3747 3856.75,3747 ; 3852.75,3747.5 3856.25,3747.5 ; 3852.75,3748 3855.75,3748 ; 3852.75,3755 3899.75,3755 ; 3852.75,3840.5 3897.25,3840.5 ; 3853.25,3713.5 3872.75,3713.5 ; 3853.25,3729.5 3859.25,3729.5 ; 3853.25,3745.5 3858.25,3745.5 ; 3853.25,3746 3857.75,3746 ; 3853.25,3754.5 3899.25,3754.5 ; 3853.25,3841 3897.75,3841 ; 3853.25,3882 3872.25,3882 ; 3853.75,3730 3858.25,3730 ; 3853.75,3744.5 3859.25,3744.5 ; 3853.75,3745 3858.75,3745 ; 3853.75,3754 3898.25,3754 ; 3853.75,3841.5 3898.25,3841.5 ; 3853.75,3859.5 3869.75,3859.5 ; 3853.75,3882.5 3873.25,3882.5 ; 3854.25,3713 3872.75,3713 ; 3854.25,3730.5 3857.75,3730.5 ; 3854.25,3743.5 3860.25,3743.5 ; 3854.25,3744 3859.75,3744 ; 3854.25,3753 3896.75,3753 ; 3854.25,3753.5 3897.75,3753.5 ; 3854.25,3842 3898.75,3842 ; 3854.25,3842.5 3899.75,3842.5 ; 3854.25,3860 3870.25,3860 ; 3854.25,3860.5 3870.75,3860.5 ; 3854.75,3712.5 3873.25,3712.5 ; 3854.75,3731 3857.25,3731 ; 3854.75,3743 3860.75,3743 ; 3854.75,3752.5 3896.25,3752.5 ; 3854.75,3843 3900.25,3843 ; 3854.75,3883 3874.75,3883 ; 3855.25,3731.5 3857.75,3731.5 ; 3855.25,3732 3857.75,3732 ; 3855.25,3742.5 3861.25,3742.5 ; 3855.25,3752 3895.75,3752 ; 3855.25,3843.5 3900.75,3843.5 ; 3855.75,3712 3873.25,3712 ; 3855.75,3732.5 3875.75,3732.5 ; 3855.75,3742 3861.75,3742 ; 3855.75,3751.5 3894.75,3751.5 ; 3855.75,3844 3901.25,3844 ; 3855.75,3883.5 3875.75,3883.5 ; 3856.25,3711.5 3873.75,3711.5 ; 3856.25,3722 3864.25,3722 ; 3856.25,3722.5 3864.25,3722.5 ; 3856.25,3733 3874.75,3733 ; 3856.25,3734 3872.75,3734 ; 3856.25,3741.5 3862.75,3741.5 ; 3856.25,3750.5 3893.25,3750.5 ; 3856.25,3751 3894.25,3751 ; 3856.25,3844.5 3901.75,3844.5 ; 3856.25,3845 3902.75,3845 ; 3856.25,3884 3877.25,3884 ; 3856.75,3723 3864.25,3723 ; 3856.75,3733.5 3873.75,3733.5 ; 3856.75,3845.5 3902.75,3845.5 ; 3857.25,3711 3874.25,3711 ; 3857.25,3723.5 3864.25,3723.5 ; 3857.25,3724 3864.25,3724 ; 3857.25,3741 3862.75,3741 ; 3857.25,3749.5 3891.75,3749.5 ; 3857.25,3750 3892.75,3750 ; 3857.25,3846 3903.75,3846 ; 3857.25,3872.5 3861.25,3872.5 ; 3857.25,3884.5 3878.25,3884.5 ; 3857.75,3710.5 3875.75,3710.5 ; 3857.75,3724.5 3864.25,3724.5 ; 3857.75,3740.5 3863.75,3740.5 ; 3857.75,3846.5 3904.25,3846.5 ; 3857.75,3870 3859.25,3870 ; 3857.75,3885 3880.75,3885 ; 3858.25,3725 3864.25,3725 ; 3858.25,3725.5 3864.25,3725.5 ; 3858.25,3732 3876.25,3732 ; 3858.25,3748.5 3890.25,3748.5 ; 3858.25,3749 3890.75,3749 ; 3858.25,3847 3904.75,3847 ; 3858.25,3869 3861.25,3869 ; 3858.25,3869.5 3859.75,3869.5 ; 3858.25,3872 3861.75,3872 ; 3858.75,3710 3882.25,3710 ; 3858.75,3731.5 3877.75,3731.5 ; 3858.75,3748 3889.25,3748 ; 3858.75,3847.5 3905.75,3847.5 ; 3858.75,3868.5 3862.25,3868.5 ; 3858.75,3885.5 3881.25,3885.5 ; 3859.25,3726 3864.75,3726 ; 3859.25,3726.5 3864.75,3726.5 ; 3859.25,3731 3878.25,3731 ; 3859.25,3740 3864.25,3740 ; 3859.25,3747.5 3888.75,3747.5 ; 3859.25,3848 3906.25,3848 ; 3859.25,3867.5 3864.25,3867.5 ; 3859.25,3868 3863.25,3868 ; 3859.25,3871.5 3861.75,3871.5 ; 3859.75,3709.5 3882.25,3709.5 ; 3859.75,3727 3862.25,3727 ; 3859.75,3747 3887.75,3747 ; 3859.75,3848.5 3906.75,3848.5 ; 3859.75,3867 3884.25,3867 ; 3859.75,3886 3885.25,3886 ; 3860.25,3727.5 3861.75,3727.5 ; 3860.25,3728 3860.75,3728 ; 3860.25,3730.5 3879.75,3730.5 ; 3860.25,3739.5 3864.75,3739.5 ; 3860.25,3746.5 3886.75,3746.5 ; 3860.25,3849 3907.75,3849 ; 3860.25,3864.5 3878.25,3864.5 ; 3860.25,3866 3881.75,3866 ; 3860.25,3866.5 3882.75,3866.5 ; 3860.25,3871 3862.25,3871 ; 3860.25,3886.5 3885.25,3886.5 ; 3860.75,3709 3881.75,3709 ; 3860.75,3730 3880.25,3730 ; 3860.75,3746 3885.75,3746 ; 3860.75,3849.5 3908.25,3849.5 ; 3860.75,3865 3879.25,3865 ; 3860.75,3865.5 3880.25,3865.5 ; 3861.25,3708.5 3881.75,3708.5 ; 3861.25,3729.5 3881.75,3729.5 ; 3861.25,3745.5 3885.25,3745.5 ; 3861.25,3850 3908.75,3850 ; 3861.25,3870.5 3862.75,3870.5 ; 3861.25,3876 3865.25,3876 ; 3861.25,3887 3889.75,3887 ; 3861.75,3745 3883.75,3745 ; 3861.75,3850.5 3909.25,3850.5 ; 3861.75,3875 3865.75,3875 ; 3861.75,3875.5 3865.25,3875.5 ; 3862.25,3708 3882.25,3708 ; 3862.25,3729 3882.75,3729 ; 3862.25,3744.5 3883.25,3744.5 ; 3862.25,3851 3910.25,3851 ; 3862.25,3874 3866.25,3874 ; 3862.25,3874.5 3865.75,3874.5 ; 3862.25,3887.5 3889.75,3887.5 ; 3862.75,3728.5 3884.25,3728.5 ; 3862.75,3851.5 3910.75,3851.5 ; 3862.75,3873.5 3866.25,3873.5 ; 3863.25,3707.5 3894.25,3707.5 ; 3863.25,3727 3888.25,3727 ; 3863.25,3727.5 3887.25,3727.5 ; 3863.25,3728 3885.25,3728 ; 3863.25,3743.5 3881.25,3743.5 ; 3863.25,3744 3881.75,3744 ; 3863.25,3852 3911.75,3852 ; 3863.25,3872.5 3866.75,3872.5 ; 3863.25,3873 3866.75,3873 ; 3863.25,3888 3890.75,3888 ; 3863.75,3717.5 3873.75,3717.5 ; 3863.75,3872 3867.25,3872 ; 3864.25,3707 3894.75,3707 ; 3864.25,3718 3873.75,3718 ; 3864.25,3718.5 3874.75,3718.5 ; 3864.25,3743 3879.75,3743 ; 3864.25,3852.5 3912.25,3852.5 ; 3864.25,3871 3867.75,3871 ; 3864.25,3871.5 3867.25,3871.5 ; 3864.25,3888.5 3895.75,3888.5 ; 3864.75,3719 3874.75,3719 ; 3864.75,3719.5 3875.75,3719.5 ; 3864.75,3742.5 3878.75,3742.5 ; 3864.75,3853 3913.25,3853 ; 3864.75,3867.5 3885.25,3867.5 ; 3864.75,3870.5 3867.75,3870.5 ; 3864.75,3889 3896.75,3889 ; 3865.25,3706.5 3894.75,3706.5 ; 3865.25,3720 3876.75,3720 ; 3865.25,3720.5 3948.25,3720.5 ; 3865.25,3742 3877.25,3742 ; 3865.25,3853.5 3913.75,3853.5 ; 3865.25,3869.5 3891.25,3869.5 ; 3865.25,3870 3868.25,3870 ; 3865.75,3723 3866.75,3723 ; 3865.75,3723.5 3867.75,3723.5 ; 3865.75,3724 3868.25,3724 ; 3865.75,3724.5 3899.25,3724.5 ; 3865.75,3726.5 3890.25,3726.5 ; 3865.75,3741.5 3876.25,3741.5 ; 3865.75,3854 3914.25,3854 ; 3865.75,3868 3886.75,3868 ; 3865.75,3869 3889.75,3869 ; 3866.25,3706 3894.75,3706 ; 3866.25,3721 3949.25,3721 ; 3866.25,3725 3896.25,3725 ; 3866.25,3725.5 3894.25,3725.5 ; 3866.25,3726 3891.75,3726 ; 3866.25,3868.5 3887.75,3868.5 ; 3866.25,3877.5 3876.75,3877.5 ; 3866.25,3889.5 3905.75,3889.5 ; 3866.75,3741 3874.75,3741 ; 3866.75,3854.5 3915.25,3854.5 ; 3866.75,3876.5 3869.75,3876.5 ; 3866.75,3877 3876.75,3877 ; 3866.75,3890 3907.25,3890 ; 3867.25,3705.5 3895.25,3705.5 ; 3867.25,3721.5 3950.75,3721.5 ; 3867.25,3740.5 3873.75,3740.5 ; 3867.25,3855 3916.25,3855 ; 3867.25,3876 3868.75,3876 ; 3867.25,3878 3876.75,3878 ; 3867.75,3740 3871.75,3740 ; 3867.75,3855.5 3916.75,3855.5 ; 3868.25,3722 3951.75,3722 ; 3868.25,3739.5 3869.25,3739.5 ; 3868.25,3856 3917.25,3856 ; 3868.25,3873.5 3872.75,3873.5 ; 3868.25,3874 3947.25,3874 ; 3868.25,3874.5 3877.75,3874.5 ; 3868.25,3878.5 3876.25,3878.5 ; 3868.25,3890.5 3953.25,3890.5 ; 3868.75,3705 3895.75,3705 ; 3868.75,3722.5 3957.25,3722.5 ; 3868.75,3872.5 3870.75,3872.5 ; 3868.75,3873 3871.75,3873 ; 3869.25,3704.5 3896.75,3704.5 ; 3869.25,3856.5 3918.25,3856.5 ; 3869.25,3870 3893.75,3870 ; 3869.25,3872 3870.25,3872 ; 3869.25,3875 3877.75,3875 ; 3869.25,3879 3876.25,3879 ; 3869.25,3891 3952.25,3891 ; 3869.75,3723 3957.25,3723 ; 3869.75,3724 3902.75,3724 ; 3869.75,3857 3919.25,3857 ; 3870.25,3704 3905.75,3704 ; 3870.25,3723.5 3957.25,3723.5 ; 3870.25,3870.5 3895.75,3870.5 ; 3870.25,3875.5 3877.75,3875.5 ; 3870.25,3876 3877.25,3876 ; 3870.25,3876.5 3877.25,3876.5 ; 3870.25,3879.5 3875.75,3879.5 ; 3870.25,3880 3875.75,3880 ; 3870.25,3880.5 3875.75,3880.5 ; 3870.75,3857.5 3919.75,3857.5 ; 3870.75,3891.5 3950.75,3891.5 ; 3871.25,3812 3878.25,3812 ; 3871.25,3812.5 3878.25,3812.5 ; 3871.25,3813 3878.75,3813 ; 3871.25,3813.5 3878.25,3813.5 ; 3871.25,3814 3878.25,3814 ; 3871.25,3858 3920.75,3858 ; 3871.25,3871 3898.75,3871 ; 3871.25,3892 3949.75,3892 ; 3871.75,3703.5 3906.75,3703.5 ; 3871.75,3737.5 3950.25,3737.5 ; 3871.75,3811 3877.75,3811 ; 3871.75,3811.5 3878.25,3811.5 ; 3871.75,3814.5 3877.75,3814.5 ; 3871.75,3815 3877.75,3815 ; 3872.25,3737 3949.25,3737 ; 3872.25,3794 3874.25,3794 ; 3872.25,3794.5 3874.25,3794.5 ; 3872.25,3795 3874.25,3795 ; 3872.25,3795.5 3873.75,3795.5 ; 3872.25,3796 3873.75,3796 ; 3872.25,3796.5 3873.75,3796.5 ; 3872.25,3797 3873.75,3797 ; 3872.25,3797.5 3873.25,3797.5 ; 3872.25,3798 3873.25,3798 ; 3872.25,3798.5 3872.75,3798.5 ; 3872.25,3799 3872.75,3799 ; 3872.25,3810.5 3877.75,3810.5 ; 3872.25,3815.5 3877.25,3815.5 ; 3872.25,3858.5 3921.25,3858.5 ; 3872.25,3871.5 3901.75,3871.5 ; 3872.75,3736.5 3948.25,3736.5 ; 3872.75,3738 3950.25,3738 ; 3872.75,3784 3877.75,3784 ; 3872.75,3784.5 3877.75,3784.5 ; 3872.75,3785 3877.25,3785 ; 3872.75,3785.5 3877.25,3785.5 ; 3872.75,3786 3876.75,3786 ; 3872.75,3786.5 3876.75,3786.5 ; 3872.75,3787 3876.75,3787 ; 3872.75,3787.5 3876.75,3787.5 ; 3872.75,3788 3876.25,3788 ; 3872.75,3788.5 3876.25,3788.5 ; 3872.75,3789 3875.75,3789 ; 3872.75,3789.5 3875.75,3789.5 ; 3872.75,3790 3875.75,3790 ; 3872.75,3790.5 3875.75,3790.5 ; 3872.75,3791 3875.25,3791 ; 3872.75,3791.5 3875.25,3791.5 ; 3872.75,3792 3875.25,3792 ; 3872.75,3792.5 3874.75,3792.5 ; 3872.75,3793 3874.75,3793 ; 3872.75,3793.5 3874.75,3793.5 ; 3872.75,3810 3876.75,3810 ; 3872.75,3859 3922.25,3859 ; 3873.25,3703 3948.25,3703 ; 3873.25,3816 3876.75,3816 ; 3873.25,3872 3950.25,3872 ; 3873.25,3881 3875.25,3881 ; 3873.25,3892.5 3948.25,3892.5 ; 3873.75,3809.5 3875.75,3809.5 ; 3873.75,3859.5 3923.25,3859.5 ; 3873.75,3873.5 3947.75,3873.5 ; 3873.75,3893 3947.25,3893 ; 3874.25,3702.5 3947.25,3702.5 ; 3874.25,3713.5 3878.75,3713.5 ; 3874.25,3714 3879.25,3714 ; 3874.25,3714.5 3879.25,3714.5 ; 3874.25,3736 3947.25,3736 ; 3874.25,3738.5 3951.25,3738.5 ; 3874.25,3872.5 3948.75,3872.5 ; 3874.25,3873 3948.25,3873 ; 3874.75,3713 3878.75,3713 ; 3874.75,3715 3879.75,3715 ; 3874.75,3715.5 3879.75,3715.5 ; 3874.75,3735.5 3946.75,3735.5 ; 3874.75,3860 3924.25,3860 ; 3875.25,3702 3945.75,3702 ; 3875.25,3712.5 3878.25,3712.5 ; 3875.25,3716 3879.75,3716 ; 3875.25,3716.5 3879.75,3716.5 ; 3875.25,3717 3879.75,3717 ; 3875.25,3893.5 3946.25,3893.5 ; 3875.75,3712 3877.25,3712 ; 3875.75,3717.5 3879.25,3717.5 ; 3875.75,3735 3945.75,3735 ; 3875.75,3739 3952.25,3739 ; 3875.75,3860.5 3925.25,3860.5 ; 3876.25,3718 3878.75,3718 ; 3876.25,3734.5 3945.25,3734.5 ; 3876.25,3861 3926.25,3861 ; 3876.75,3701.5 3944.75,3701.5 ; 3876.75,3882 3882.75,3882 ; 3876.75,3894 3944.75,3894 ; 3877.25,3734 3943.75,3734 ; 3877.25,3739.5 3952.75,3739.5 ; 3877.25,3861.5 3927.25,3861.5 ; 3877.25,3880.5 3883.25,3880.5 ; 3877.25,3881 3883.25,3881 ; 3877.25,3881.5 3882.75,3881.5 ; 3877.25,3882.5 3882.25,3882.5 ; 3877.75,3720 3947.75,3720 ; 3877.75,3807.5 3884.75,3807.5 ; 3877.75,3808 3885.25,3808 ; 3877.75,3879.5 3883.75,3879.5 ; 3877.75,3880 3883.75,3880 ; 3878.25,3701 3942.75,3701 ; 3878.25,3710.5 3882.75,3710.5 ; 3878.25,3733.5 3943.25,3733.5 ; 3878.25,3740 3953.25,3740 ; 3878.25,3806 3884.75,3806 ; 3878.25,3806.5 3884.75,3806.5 ; 3878.25,3807 3884.75,3807 ; 3878.25,3817.5 3940.25,3817.5 ; 3878.25,3862 3928.25,3862 ; 3878.25,3878 3884.75,3878 ; 3878.25,3878.5 3884.75,3878.5 ; 3878.25,3879 3884.25,3879 ; 3878.25,3883 3881.75,3883 ; 3878.25,3894.5 3943.25,3894.5 ; 3878.75,3804.5 3883.75,3804.5 ; 3878.75,3805 3884.25,3805 ; 3878.75,3805.5 3884.25,3805.5 ; 3878.75,3808.5 3885.25,3808.5 ; 3878.75,3817 3939.25,3817 ; 3878.75,3818 3979.75,3818 ; 3878.75,3877 3885.25,3877 ; 3878.75,3877.5 3884.75,3877.5 ; 3879.25,3700.5 3941.75,3700.5 ; 3879.25,3711 3882.75,3711 ; 3879.25,3719.5 3948.25,3719.5 ; 3879.25,3740.5 3954.25,3740.5 ; 3879.25,3802.5 3883.25,3802.5 ; 3879.25,3803 3883.75,3803 ; 3879.25,3803.5 3883.75,3803.5 ; 3879.25,3804 3883.75,3804 ; 3879.25,3809 3885.25,3809 ; 3879.25,3816.5 3938.25,3816.5 ; 3879.25,3818.5 3979.25,3818.5 ; 3879.25,3862.5 3929.25,3862.5 ; 3879.25,3874.5 3947.25,3874.5 ; 3879.25,3875.5 3946.75,3875.5 ; 3879.25,3876 3951.25,3876 ; 3879.25,3876.5 3950.25,3876.5 ; 3879.25,3883.5 3881.75,3883.5 ; 3879.25,3884 3881.75,3884 ; 3879.25,3884.5 3881.25,3884.5 ; 3879.25,3895 3941.75,3895 ; 3879.75,3711.5 3882.75,3711.5 ; 3879.75,3733 3941.75,3733 ; 3879.75,3801.5 3883.25,3801.5 ; 3879.75,3802 3883.25,3802 ; 3879.75,3809.5 3885.75,3809.5 ; 3879.75,3810 3885.75,3810 ; 3879.75,3816 3938.25,3816 ; 3879.75,3819 3979.25,3819 ; 3879.75,3875 3947.25,3875 ; 3880.25,3712 3882.75,3712 ; 3880.25,3712.5 3883.25,3712.5 ; 3880.25,3718.5 3948.25,3718.5 ; 3880.25,3719 3948.25,3719 ; 3880.25,3732.5 3940.75,3732.5 ; 3880.25,3800 3882.75,3800 ; 3880.25,3800.5 3882.75,3800.5 ; 3880.25,3801 3882.75,3801 ; 3880.25,3810.5 3885.75,3810.5 ; 3880.25,3811 3885.75,3811 ; 3880.25,3811.5 3885.75,3811.5 ; 3880.25,3814 3936.75,3814 ; 3880.25,3814.5 3937.25,3814.5 ; 3880.25,3815 3937.25,3815 ; 3880.25,3815.5 3937.25,3815.5 ; 3880.25,3819.5 3979.25,3819.5 ; 3880.25,3820 3979.25,3820 ; 3880.25,3863 3930.25,3863 ; 3880.75,3713 3883.25,3713 ; 3880.75,3713.5 3883.75,3713.5 ; 3880.75,3718 3941.75,3718 ; 3880.75,3741 3954.75,3741 ; 3880.75,3798.5 3882.25,3798.5 ; 3880.75,3799 3882.25,3799 ; 3880.75,3799.5 3882.75,3799.5 ; 3880.75,3812 3936.75,3812 ; 3880.75,3812.5 3936.25,3812.5 ; 3880.75,3813 3936.75,3813 ; 3880.75,3813.5 3936.75,3813.5 ; 3880.75,3820.5 3978.75,3820.5 ; 3881.25,3714 3883.75,3714 ; 3881.25,3714.5 3883.75,3714.5 ; 3881.25,3715 3883.75,3715 ; 3881.25,3715.5 3884.25,3715.5 ; 3881.25,3716 3884.25,3716 ; 3881.25,3716.5 3884.25,3716.5 ; 3881.25,3717 3884.75,3717 ; 3881.25,3717.5 3941.25,3717.5 ; 3881.25,3797 3881.75,3797 ; 3881.25,3797.5 3881.75,3797.5 ; 3881.25,3798 3882.25,3798 ; 3881.25,3821 3978.75,3821 ; 3881.75,3732 3939.75,3732 ; 3881.75,3741.5 3955.25,3741.5 ; 3881.75,3821.5 3978.25,3821.5 ; 3881.75,3863.5 3931.25,3863.5 ; 3881.75,3895.5 3939.75,3895.5 ; 3882.25,3700 3939.25,3700 ; 3882.25,3731.5 3938.75,3731.5 ; 3882.25,3822 3978.25,3822 ; 3882.25,3822.5 3978.25,3822.5 ; 3882.25,3864 3932.75,3864 ; 3882.25,3885.5 3885.25,3885.5 ; 3882.75,3885 3885.25,3885 ; 3883.25,3699.5 3938.25,3699.5 ; 3883.25,3708 3894.25,3708 ; 3883.25,3742 3955.75,3742 ; 3883.25,3823 3978.25,3823 ; 3883.25,3884 3885.25,3884 ; 3883.25,3884.5 3885.25,3884.5 ; 3883.25,3896 3938.25,3896 ; 3883.75,3708.5 3894.25,3708.5 ; 3883.75,3709 3894.25,3709 ; 3883.75,3742.5 3956.75,3742.5 ; 3883.75,3823.5 3977.75,3823.5 ; 3883.75,3824 3977.75,3824 ; 3883.75,3864.5 3933.75,3864.5 ; 3883.75,3883 3885.25,3883 ; 3883.75,3883.5 3885.25,3883.5 ; 3884.25,3709.5 3894.75,3709.5 ; 3884.25,3710 3894.75,3710 ; 3884.25,3710.5 3894.75,3710.5 ; 3884.25,3711 3885.25,3711 ; 3884.25,3731 3937.25,3731 ; 3884.25,3824.5 3977.25,3824.5 ; 3884.25,3882 3885.25,3882 ; 3884.25,3882.5 3885.25,3882.5 ; 3884.75,3784 3889.75,3784 ; 3884.75,3784.5 3889.75,3784.5 ; 3884.75,3825 3977.25,3825 ; 3884.75,3865 3935.25,3865 ; 3884.75,3881.5 3885.25,3881.5 ; 3885.25,3699 3936.25,3699 ; 3885.25,3712.5 3895.75,3712.5 ; 3885.25,3713 3896.25,3713 ; 3885.25,3713.5 3897.25,3713.5 ; 3885.25,3714 3924.75,3714 ; 3885.25,3714.5 3888.25,3714.5 ; 3885.25,3717 3941.25,3717 ; 3885.25,3730.5 3936.25,3730.5 ; 3885.25,3743 3957.25,3743 ; 3885.25,3785 3889.75,3785 ; 3885.25,3785.5 3889.75,3785.5 ; 3885.25,3786 3889.75,3786 ; 3885.25,3786.5 3889.75,3786.5 ; 3885.25,3825.5 3977.25,3825.5 ; 3885.25,3896.5 3936.25,3896.5 ; 3885.75,3715 3886.25,3715 ; 3885.75,3743.5 3957.75,3743.5 ; 3885.75,3787 3889.75,3787 ; 3885.75,3787.5 3889.75,3787.5 ; 3885.75,3788 3889.75,3788 ; 3885.75,3826 3976.75,3826 ; 3886.25,3716.5 3941.25,3716.5 ; 3886.25,3788.5 3889.75,3788.5 ; 3886.25,3789 3889.75,3789 ; 3886.25,3789.5 3889.75,3789.5 ; 3886.25,3826.5 3976.25,3826.5 ; 3886.25,3865.5 3934.75,3865.5 ; 3886.25,3877 3937.25,3877 ; 3886.75,3711 3894.75,3711 ; 3886.75,3730 3934.75,3730 ; 3886.75,3744 3958.25,3744 ; 3886.75,3790 3889.75,3790 ; 3886.75,3790.5 3889.75,3790.5 ; 3886.75,3827 3976.25,3827 ; 3886.75,3877.5 3934.75,3877.5 ; 3886.75,3878 3933.25,3878 ; 3886.75,3878.5 3890.25,3878.5 ; 3886.75,3879 3889.75,3879 ; 3886.75,3879.5 3889.75,3879.5 ; 3886.75,3880 3889.25,3880 ; 3886.75,3880.5 3889.25,3880.5 ; 3886.75,3881 3888.75,3881 ; 3886.75,3881.5 3888.75,3881.5 ; 3886.75,3882 3888.25,3882 ; 3886.75,3882.5 3888.25,3882.5 ; 3886.75,3883 3887.75,3883 ; 3886.75,3883.5 3887.75,3883.5 ; 3886.75,3884 3887.25,3884 ; 3886.75,3897 3934.25,3897 ; 3887.25,3698.5 3934.25,3698.5 ; 3887.25,3711.5 3895.25,3711.5 ; 3887.25,3712 3895.25,3712 ; 3887.25,3791 3889.75,3791 ; 3887.25,3791.5 3889.75,3791.5 ; 3887.25,3792 3889.75,3792 ; 3887.25,3792.5 3889.75,3792.5 ; 3887.25,3827.5 3976.25,3827.5 ; 3887.25,3886.5 3889.75,3886.5 ; 3887.75,3729.5 3933.25,3729.5 ; 3887.75,3744.5 3959.25,3744.5 ; 3887.75,3793 3889.75,3793 ; 3887.75,3793.5 3889.75,3793.5 ; 3887.75,3794 3889.75,3794 ; 3887.75,3828 3975.75,3828 ; 3887.75,3866 3933.75,3866 ; 3887.75,3886 3889.75,3886 ; 3888.25,3716 3941.25,3716 ; 3888.25,3794.5 3889.75,3794.5 ; 3888.25,3795 3889.75,3795 ; 3888.25,3795.5 3889.75,3795.5 ; 3888.25,3828.5 3975.75,3828.5 ; 3888.25,3829 3975.25,3829 ; 3888.25,3885 3890.25,3885 ; 3888.25,3885.5 3890.25,3885.5 ; 3888.75,3745 3959.25,3745 ; 3888.75,3796 3889.75,3796 ; 3888.75,3796.5 3889.75,3796.5 ; 3888.75,3797 3889.75,3797 ; 3888.75,3884 3890.25,3884 ; 3888.75,3884.5 3890.25,3884.5 ; 3889.25,3698 3889.75,3698 ; 3889.25,3745.5 3960.25,3745.5 ; 3889.25,3797.5 3890.25,3797.5 ; 3889.25,3798 3890.25,3798 ; 3889.25,3798.5 3890.25,3798.5 ; 3889.25,3799 3890.25,3799 ; 3889.25,3829.5 3975.25,3829.5 ; 3889.25,3830 3975.25,3830 ; 3889.25,3866.5 3931.75,3866.5 ; 3889.25,3883 3890.25,3883 ; 3889.25,3883.5 3890.25,3883.5 ; 3889.25,3897.5 3932.25,3897.5 ; 3889.75,3714.5 3930.75,3714.5 ; 3889.75,3715 3931.25,3715 ; 3889.75,3715.5 3933.75,3715.5 ; 3889.75,3729 3931.75,3729 ; 3890.25,3698 3931.75,3698 ; 3890.25,3746 3960.25,3746 ; 3890.25,3830.5 3974.75,3830.5 ; 3890.25,3831 3974.25,3831 ; 3890.75,3867 3930.25,3867 ; 3891.25,3697.5 3929.75,3697.5 ; 3891.25,3728.5 3930.25,3728.5 ; 3891.25,3746.5 3961.25,3746.5 ; 3891.25,3831.5 3974.25,3831.5 ; 3891.25,3832 3973.75,3832 ; 3891.75,3878.5 3930.25,3878.5 ; 3891.75,3879 3927.75,3879 ; 3891.75,3879.5 3897.75,3879.5 ; 3891.75,3880 3896.75,3880 ; 3891.75,3880.5 3895.75,3880.5 ; 3891.75,3881 3895.75,3881 ; 3891.75,3881.5 3895.25,3881.5 ; 3891.75,3882 3894.75,3882 ; 3891.75,3882.5 3894.75,3882.5 ; 3891.75,3883 3894.75,3883 ; 3891.75,3883.5 3894.25,3883.5 ; 3891.75,3884 3894.25,3884 ; 3891.75,3884.5 3894.25,3884.5 ; 3891.75,3885 3894.25,3885 ; 3891.75,3885.5 3894.25,3885.5 ; 3891.75,3886 3894.75,3886 ; 3891.75,3886.5 3894.75,3886.5 ; 3891.75,3887 3894.75,3887 ; 3891.75,3887.5 3894.75,3887.5 ; 3891.75,3888 3895.75,3888 ; 3891.75,3898 3930.25,3898 ; 3892.25,3747 3961.25,3747 ; 3892.25,3832.5 3973.75,3832.5 ; 3892.25,3833 3973.25,3833 ; 3892.75,3747.5 3962.25,3747.5 ; 3892.75,3867.5 3928.25,3867.5 ; 3893.25,3728 3927.75,3728 ; 3893.25,3833.5 3973.25,3833.5 ; 3893.75,3748 3962.25,3748 ; 3893.75,3834 3972.75,3834 ; 3894.25,3748.5 3963.25,3748.5 ; 3894.25,3834.5 3972.25,3834.5 ; 3894.75,3835 3972.25,3835 ; 3894.75,3868 3926.75,3868 ; 3894.75,3898.5 3926.75,3898.5 ; 3895.25,3727.5 3926.25,3727.5 ; 3895.25,3749 3963.25,3749 ; 3895.25,3835.5 3971.75,3835.5 ; 3895.75,3697 3925.75,3697 ; 3895.75,3749.5 3964.25,3749.5 ; 3895.75,3836 3971.75,3836 ; 3896.25,3706.5 3899.75,3706.5 ; 3896.25,3707 3903.75,3707 ; 3896.25,3707.5 3903.75,3707.5 ; 3896.25,3708 3903.75,3708 ; 3896.25,3708.5 3903.75,3708.5 ; 3896.25,3709 3903.75,3709 ; 3896.25,3709.5 3903.75,3709.5 ; 3896.25,3710 3904.25,3710 ; 3896.25,3710.5 3904.25,3710.5 ; 3896.25,3836.5 3971.25,3836.5 ; 3896.25,3883 3901.25,3883 ; 3896.25,3883.5 3901.25,3883.5 ; 3896.25,3884 3901.25,3884 ; 3896.25,3884.5 3901.25,3884.5 ; 3896.25,3885 3901.25,3885 ; 3896.25,3885.5 3900.75,3885.5 ; 3896.25,3886 3900.75,3886 ; 3896.25,3886.5 3900.75,3886.5 ; 3896.75,3711 3900.75,3711 ; 3896.75,3750 3964.25,3750 ; 3896.75,3837 3970.75,3837 ; 3896.75,3882 3900.75,3882 ; 3896.75,3882.5 3901.25,3882.5 ; 3896.75,3887 3900.75,3887 ; 3897.25,3706 3899.25,3706 ; 3897.25,3711.5 3900.25,3711.5 ; 3897.25,3712 3899.75,3712 ; 3897.25,3750.5 3964.75,3750.5 ; 3897.25,3837.5 3970.75,3837.5 ; 3897.25,3868.5 3923.75,3868.5 ; 3897.25,3881.5 3900.25,3881.5 ; 3897.25,3887.5 3899.75,3887.5 ; 3897.25,3899 3924.25,3899 ; 3897.75,3696.5 3922.25,3696.5 ; 3897.75,3838 3970.25,3838 ; 3898.25,3727 3923.25,3727 ; 3898.25,3751 3965.25,3751 ; 3898.25,3838.5 3969.75,3838.5 ; 3898.75,3751.5 3965.75,3751.5 ; 3898.75,3811.5 3903.75,3811.5 ; 3899.25,3784 3903.75,3784 ; 3899.25,3784.5 3903.75,3784.5 ; 3899.25,3785 3903.75,3785 ; 3899.25,3785.5 3903.75,3785.5 ; 3899.25,3786 3903.75,3786 ; 3899.25,3786.5 3903.75,3786.5 ; 3899.25,3787 3903.75,3787 ; 3899.25,3787.5 3903.75,3787.5 ; 3899.25,3788 3903.75,3788 ; 3899.25,3788.5 3903.75,3788.5 ; 3899.25,3789 3903.75,3789 ; 3899.25,3789.5 3903.75,3789.5 ; 3899.25,3790 3903.75,3790 ; 3899.25,3790.5 3903.75,3790.5 ; 3899.25,3791 3903.75,3791 ; 3899.25,3791.5 3903.75,3791.5 ; 3899.25,3792 3903.75,3792 ; 3899.25,3792.5 3903.75,3792.5 ; 3899.25,3793 3903.75,3793 ; 3899.25,3793.5 3903.75,3793.5 ; 3899.25,3794 3903.75,3794 ; 3899.25,3794.5 3903.75,3794.5 ; 3899.25,3795 3903.75,3795 ; 3899.25,3795.5 3903.75,3795.5 ; 3899.25,3796 3903.75,3796 ; 3899.25,3796.5 3903.75,3796.5 ; 3899.25,3797 3903.75,3797 ; 3899.25,3797.5 3903.75,3797.5 ; 3899.25,3798 3903.75,3798 ; 3899.25,3798.5 3903.75,3798.5 ; 3899.25,3799 3903.75,3799 ; 3899.25,3799.5 3903.75,3799.5 ; 3899.25,3800 3903.75,3800 ; 3899.25,3800.5 3903.75,3800.5 ; 3899.25,3801 3903.75,3801 ; 3899.25,3801.5 3903.75,3801.5 ; 3899.25,3802 3903.75,3802 ; 3899.25,3802.5 3903.75,3802.5 ; 3899.25,3803 3903.75,3803 ; 3899.25,3803.5 3903.75,3803.5 ; 3899.25,3804 3903.75,3804